# Altium PCB PCB2.PcbDoc
Units mm, origin at the board's own origin, x right, y up, seen from the top; angles counter-clockwise.
Board outline 76.91 x 76.67 mm, 2 copper layers (Top Layer, Bottom Layer); 20 components, 13 nets, 58 pads, 9 vias.
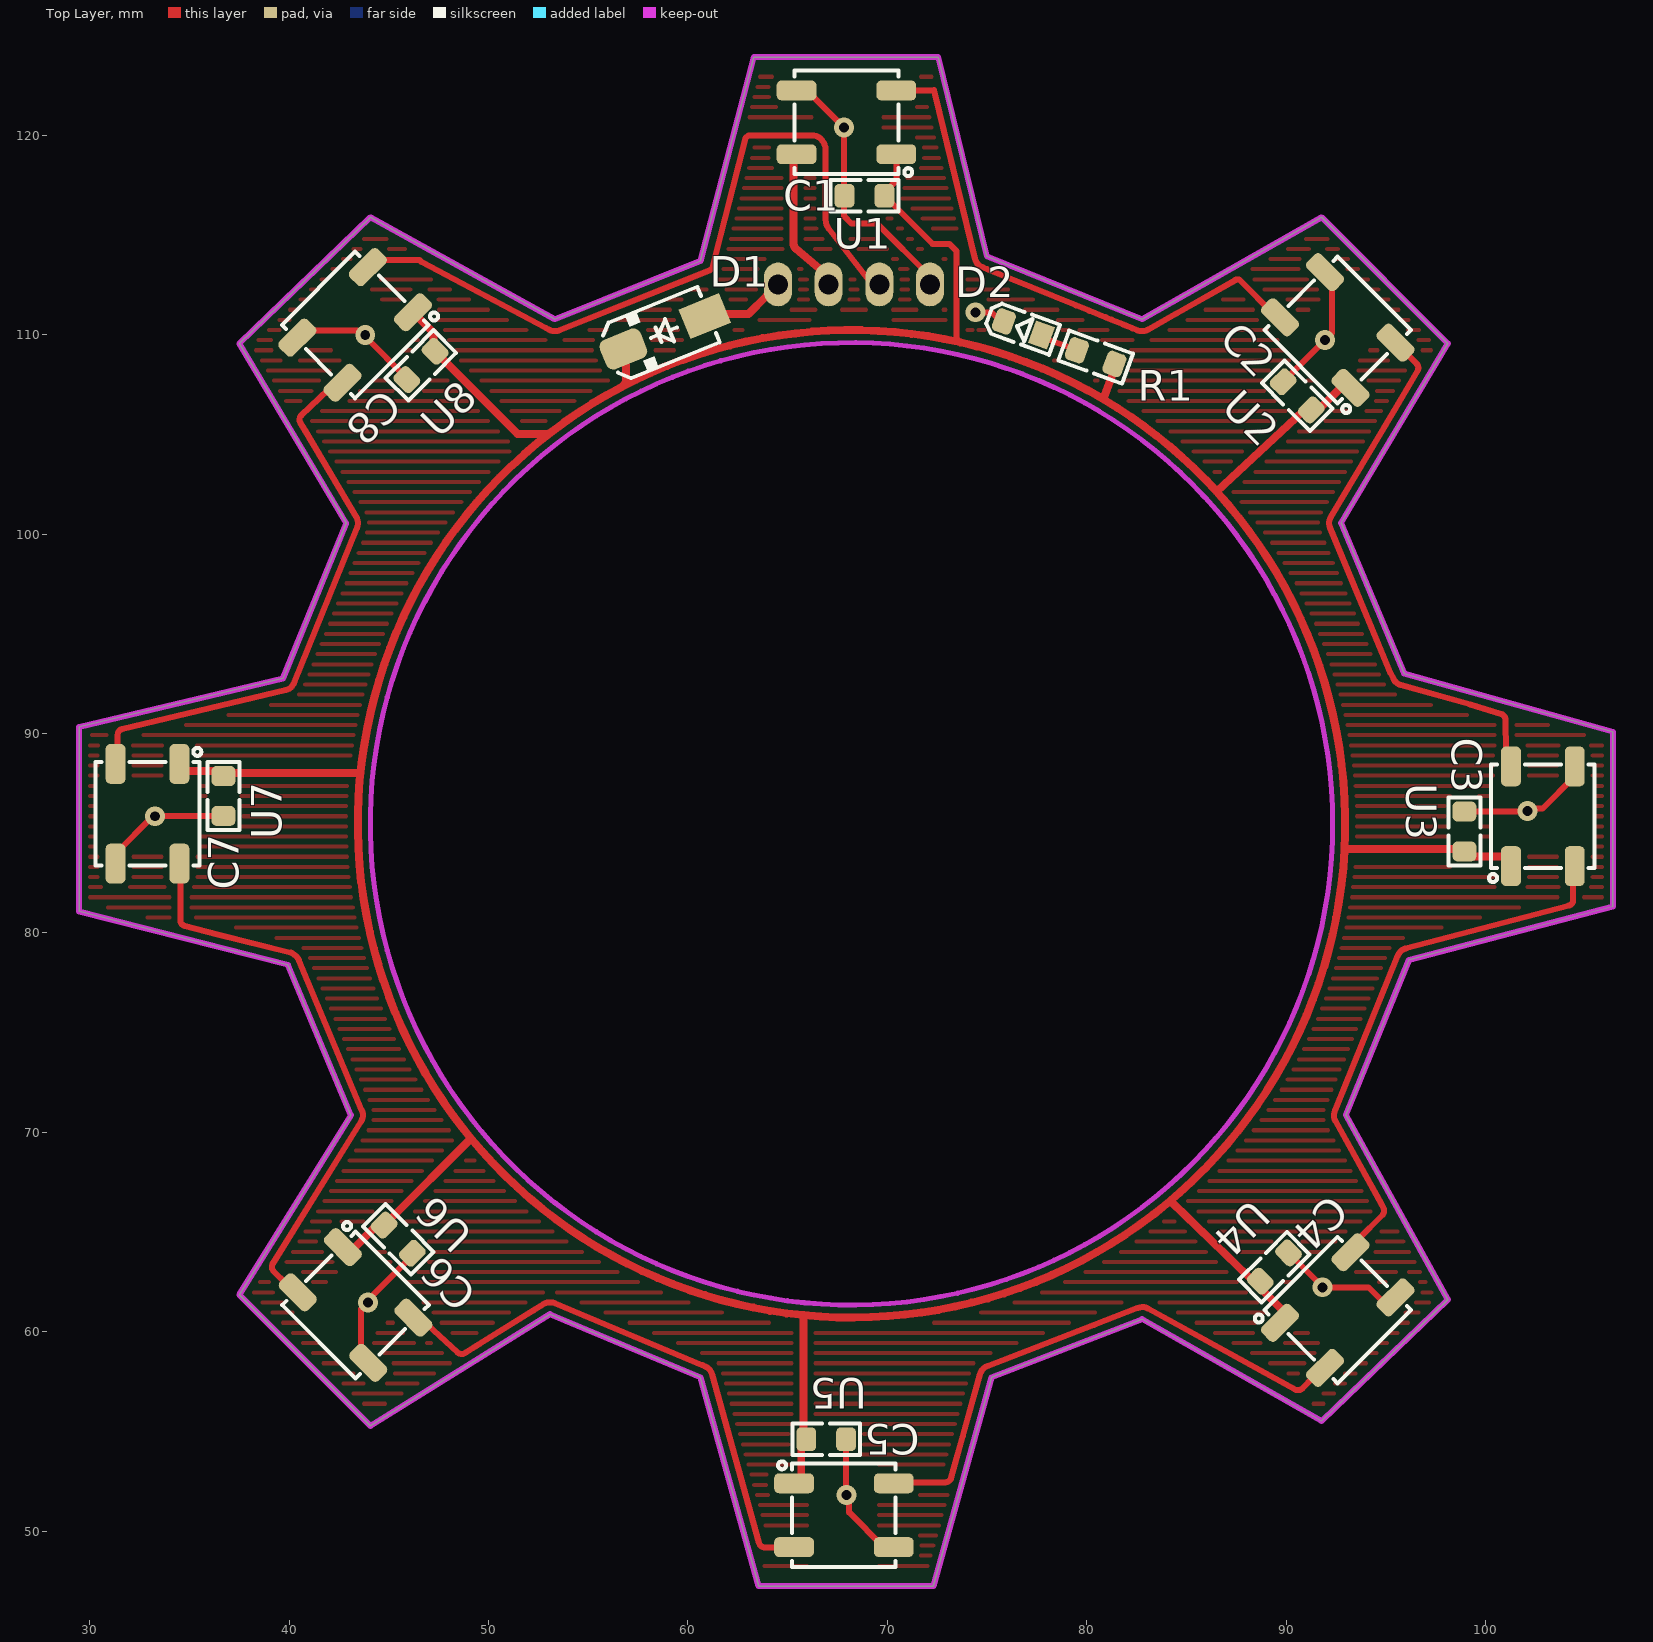
[diagram p0: Top Layer view]
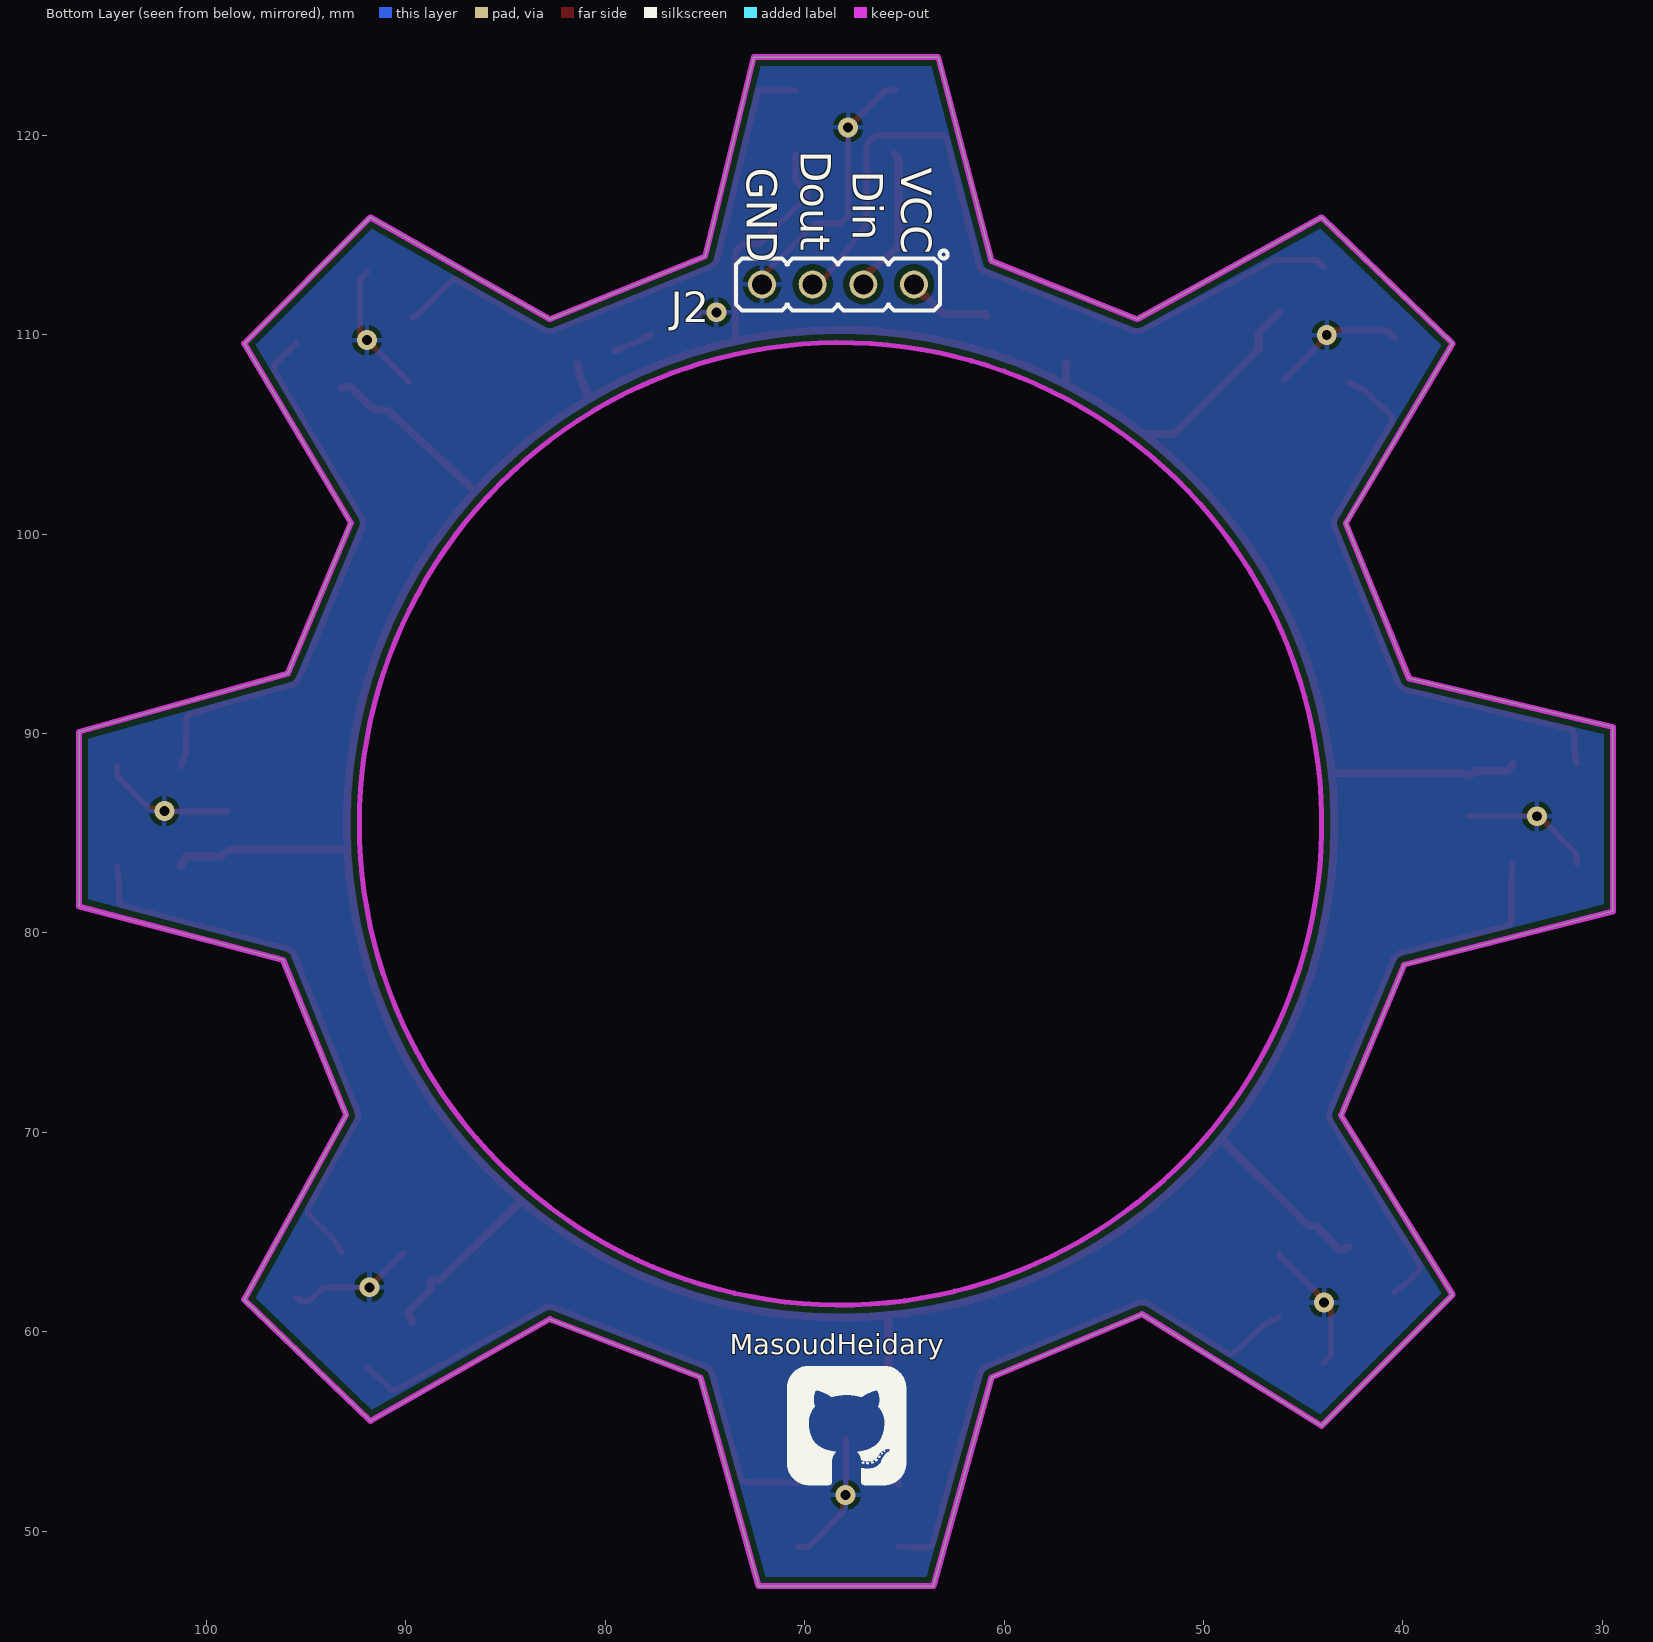
[diagram p1: Bottom Layer view, seen from below]

## Layer stack, top to bottom
Top Solder: solder mask 0.0102, Solder Resist, Dk 3.5
Top Layer: signal copper 0.0356
Dielectric 1: dielectric 0.32, FR-4, Dk 4.8
Bottom Layer: signal copper 0.0356
Bottom Solder: solder mask 0.0102, Solder Resist, Dk 3.5

## Board outline
37.499,61.853 43.097,70.859 39.933,78.404 29.466,81.081 29.466,90.331 39.689,92.765 42.853,100.553 37.499,109.559 44.07,115.888 53.32,110.776 60.622,113.697 63.299,123.92 72.548,123.92 74.982,113.94 82.771,110.776 91.777,115.888 98.105,109.559 92.75,100.553 95.915,93.008 106.381,90.087 106.381,81.325 96.158,78.647 92.994,70.859 98.105,61.609 91.777,55.524 82.771,60.636 75.226,57.715 72.305,47.249 63.542,47.249 60.622,57.715 53.076,60.879 44.07,55.281
cut-out: 68.199,61.34 cw(c68.199,85.471) 44.068,85.471 cw(c68.199,85.471) 68.199,109.602 cw(c68.199,85.471) 92.33,85.471 cw(c68.199,85.471)

## Design rules (kind name [scope] priority, off if disabled: settings)
Clearance [All] p1: gap=0.3 ignorepadtopadclearanceinfootprint=TRUE
PolygonConnect [All] p1: connectstyle=Relief reliefconductorwidth=0.254 reliefentries=4 polygonreliefangle="90 Angle" airgapwidth=0.254
RoutingVias [All] p1: holewidth=0.5 width=1 viastyle="Through Hole" minholewidth=0.5 minwidth=1 maxholewidth=0.5 maxwidth=1
SolderMaskExpansion [All] p1: expansion=0.102 istentingtop=FALSE
Width [All] p1: maxlimit=10 minlimit=0.2 preferedwidth=0.3
30 further rules are at their usual default settings.

## Components (designator, comment, footprint, x,y, rotation, side; value= is the part's Value field where it differs from the comment)
C1 "100nF" C0805 68.85,116.967 r180 top
C2 "100nF" C0805 90.551,106.934 r135 top
C3 "100nF" C0805 98.933,85.09 r90 top
C4 "100nF" C0805 89.408,63.246 r45 top
C5 "100nF" C0805 66.929,54.61 r0 top
C6 "100nF" C0805 45.466,64.643 r315 top
C7 "100nF" C0805 36.703,86.868 r270 top
C8 "100nF" C0805 46.609,108.458 r225 top
D1 "1N4007" D_SMA 58.801,110.109 r202 top
D2 "LED805GRN" LED0805GRN 76.784,110.324 r160 top
J2 "HDR1X4" HDR_M_1X4 68.326,112.522 r0 bottom value=HDRM4
R1 "270" R0805 80.442,108.878 r340 top
U1 "WS2812B-B" LED5050RGB_4 67.945,120.65 r180 top
U2 "WS2812B-B" LED5050RGB_4 92.583,110.236 r135 top
U3 "WS2812B-B" LED5050RGB_4 102.87,85.852 r90 top
U4 "WS2812B-B" LED5050RGB_4 92.583,61.087 r45 top
U5 "WS2812B-B" LED5050RGB_4 67.818,50.8 r0 top
U6 "WS2812B-B" LED5050RGB_4 43.329,61.342 r315 top
U7 "WS2812B-B" LED5050RGB_4 32.893,85.979 r270 top
U8 "WS2812B-B" LED5050RGB_4 43.307,110.49 r225 top

## Footprints (in the part's own frame and the unit in brackets; to place one, negate y for a bottom-side part, rotate by r counter-clockwise, add the part's x,y. Pads: shape width x height; smd on the part's side, far side on the other; paste and mask are expansions set on the pad)
C0805 [mm] "CHIP Capacitor, 2.0X1.3mm, 0805"
  rrect50% 1x1.2 smd paste-5 mask+0.075: 1(-1,0) 2(1,0)
  Top Layer pour cut-out: -0.5,0.8 0.5,0.8 0.5,-0.8 -0.5,-0.8
  silkscreen extent -1.7,-0.8 1.7,0.8, body extent -1,-0.62 1,0.63, height 1
D_SMA [mm] "SMA Molded Diode, 2-Leads, Body 4.3x2.7mm, SOD-128"
  rect 2.2x1.6 smd paste-0.1: 1(-2.2,0)
  rrect50% 2.2x1.6 smd paste-0.1: 2(2.2,0)
  silkscreen extent -2.4,-1.5 2.9,1.5, body extent -2.75,-1.4 2.75,1.4, height 2.6
HDR_M_1X4 [mm] "Connector; Header; 4 Position"
  round 1.4 / inner round 1.4 / far side oval 1.4x2.2 hole 1 mask+0.1: 1(-3.81,0) 2(-1.27,0) 3(1.27,0) 4(3.81,0)
  silkscreen extent -5.5,-1.7 5.11,1.3, body extent -5.08,-1.27 5.08,1.27, height 8.54
LED0805GRN [mm] "LED SMD 0805, GREEN"
  rect 1x1.2 smd paste-2 mask+0.075: 1(-1,0)
  rrect50% 1x1.2 smd paste-2 mask+0.075: 2(1,0)
  Top Layer pour cut-out: -0.5,0.8 0.5,0.8 0.5,-0.8 -0.5,-0.8
  silkscreen extent -1.7,-0.8 1.8,0.8, body extent -1,-0.63 1,0.63, height 0.7
LED5050RGB_4 [mm] "LED 5mmX5mm, PLLC6"
  rrect50% 2x1 smd mask+0.1: 1(-2.5,1.6) 2(-2.5,-1.6) 3(2.5,-1.6) 4(2.5,1.6)
  Top Layer pour cut-out: -1.75,2.54 1.65,2.54 1.65,-2.54 -1.75,-2.54
  silkscreen extent -3.3,-2.6 2.6,2.7, body extent -2.7,-2.5 2.7,2.5, height 1.55
R0805 [mm] "CHIP RESISTOR 1/8 WATT ,2.0X1.3mm, 0805, 2012"
  rrect50% 1x1.2 smd paste-5 mask+0.075: 1(-1,0) 2(1,0)
  Top Layer pour cut-out: -0.5,0.8 0.5,0.8 0.5,-0.8 -0.5,-0.8
  silkscreen extent -1.7,-0.8 1.7,0.8, body extent -1.15,-0.67 1.15,0.68, height 0.76

## Part data
C1 C2 C3 C4 C5 C6 C7 C8: library part CAP_SMD_MLCC_0805, "CAP, MLCC, -F, -V, MATERIAL, -%, 0201", ASSEMBLY=ASSEMBLY, MANF=-, MANF_P#=MANF_PART#, PARAM="-, -%", PARAM2=-V, PRICE="100= 1$"
D1: library part DIODE_SMD_1N4007, "DIODE, GENERAL PURPOSE, 1000V/1A", ASSEMBLY=ASSEMBLY, DESC=DESCRIPTION, MANF=Kingtronics, MANF_P#=M7, PARAM="1000V VRRM", PARAM2=1A, PRICE=PRICE
D2: library part LED_SMD_0805_GRN, "LED, SMD, 0805, GREEN", ASSEMBLY=ASSEMBLY, DESC=DESCRIPTION, MANF=-, MANF_P#=-, PARAM=20mA, PARAM2=2.2V, PRICE=36t@Javan
J2: library part HDR_M_1X4, "CONN, HEADER, Male, pitch: 2.54mm, 4POS"
R1: library part RES_SMD, "RESISTOR, SMD", ASSEMBLY=ASSEMBLY, DESC=DESCRIPTION, DIST#=MOUSER, MANF=-, MANF_P#=-, PARAM=-W, PARAM2=1%, PRICE="100= 0.5$"
U1 U2 U3 U4 U5 U6 U7 U8: library part WS2812B-B_5050_4L, "LED, SMD, RGB with WS2812 4Lead", ASSEMBLY=ASSEMBLY, DESC=DESCRIPTION, MANF=Worldsemi, MANF_P#=WS2812B-B, PARAM="18mA, 2KHz/s, 800Kbps", PARAM2="3.7~5.3v, -25~80oC", PRICE=-

## Via types
v1: diameter 1, hole 0.5, Top Layer to Bottom Layer, 9 vias

## Nets (pads, with @x,y where several pads share a name; then routed paths per layer and width w, separated by ;. In a path a pad name is that pad's centre, name@x,y a point inside that pad or via, vN(x,y) a via of type N, cw(c..) or ccw(c..) an arc to the next point about the centre after c; other vN are vias at no path point)
+5V0: C1.1 C2.1 C3.1 C4.1 C5.1 C6.1 C7.1 C8.1 D1.2 R1.2 U1.1 U2.1 U3.1 U4.1 U5.1 U6.1 U7.1 U8.1 | length 233.2
  Top Layer w0.3: U1.1 70.445,117.716 69.85,117.121 C1.1 69.85,116.921 70.192,116.579 70.238,116.579 72.263,114.554 73.103,114.554 73.472,114.185 73.472,109.811 73.664,109.619
  Top Layer w0.4: U7.1 34.743,88.118 36.353,88.118 C7.1 37.053,88.011 43.561,88.011 ; U6.1 43.171,64.116 44.335,65.279 C6.1 45.015,65.589 49.119,69.693 ; U8.1 47.226,110.106 47.226,109.255 C8.1 51.452,105.029 52.959,105.029 ; D1.2@56.859,108.588 cw(c56.488,108.438) 56.888,108.439 56.888,107.736 cw(c56.488,107.738) 56.676,107.384 ; U5.1 65.679,52.65 65.679,54.26 C5.1 65.786,54.96 65.786,60.831 ; 80.834,106.764 81.348,108.176 R1.2 ; 84.201,66.548 88.277,62.61 C4.1 88.772,62.115 89.883,61.003 U4.1 ; 86.507,102.138 90.834,106.156 C2.1 91.682,106.298 92.794,107.409 U2.1 ; 92.964,84.201 98.583,84.201 C3.1 99.283,83.84 101.02,83.84 U3.1 ; 49.119,69.693 ccw(c68.199,85.471) 65.786,60.831 ; 49.119,69.693 cw(c68.199,85.471) 48.254,70.802 cw(c68.199,85.471) 56.676,107.384 ; 56.676,107.384 cw(c68.199,85.471) 73.664,109.619 cw(c68.199,85.471) 80.829,106.765 cw(c68.199,85.471) 80.834,106.763 cw(c68.199,85.471) 86.502,102.143 86.507,102.138 cw(c68.199,85.471) 89.043,72.11 cw(c68.199,85.471) 65.786,60.831
Din: J2.2 U1.4 | length 7.4
  Top Layer w0.4: 65.425,114.302 cw(c65.685,114.607) 65.285,114.607 65.285,118.8 U1.4 ; 65.426,114.301 67.056,112.922 J2.2
Dout: J2.3 U8.2 | length 38.1
  Top Layer w0.3: U8.2 44.297,113.743 46.531,113.743 46.576,113.698 ccw(c46.788,113.911) 46.647,113.646 52.872,110.338 cw(c52.731,110.073) 52.877,110.336 53.029,110.251 ccw(c53.32,110.776) 53.542,110.219 61.058,113.222 61.115,113.245 61.217,113.346 62.886,119.854 62.944,119.912 63.032,120 66.195,120 cw(c66.195,119.3) 66.895,119.301 66.902,115.764 66.902,115.762 ccw(c67.622,115.762) 67.056,115.316 69.041,112.773 69.052,112.759 69.065,112.746 69.153,112.658 69.596,112.658 J2.3
GND: C1.2 C2.2 C3.2 C4.2 C5.2 C6.2 C7.2 C8.2 D2.2 J2.4 U1.3 U2.3 U3.3 U4.3 U5.3 U6.3 U7.3 U8.3 | length 61.9
  Top Layer w0.3: U7.3 31.293,83.979 33.166,85.852 v1(33.274,85.852) 33.282,85.86 36.695,85.86 C7.2 ; U8.3 40.761,110.207 43.4,110.207 43.626,109.982 v1(43.815,109.982) 43.815,109.91 45.902,107.823 C8.2 ; U6.3 43.612,58.797 43.612,61.138 v1(43.942,61.468) 43.942,61.586 46.173,63.817 C6.2 ; U1.3 65.964,122.25 v1(67.818,120.396) 67.834,120.38 67.834,115.935 68.199,115.57 69.488,115.57 72.136,112.922 J2.4 ; C5.2 67.929,51.832 v1(67.945,51.816) 68.079,51.682 68.079,50.939 69.818,49.2 U5.3 ; v1(74.422,111.125) 75.222,111.125 75.681,110.666 D2.2 ; C2.2 89.853,107.641 91.939,109.728 v1(91.948,109.728) 92.3,110.08 92.3,112.782 U2.3 ; C4.2 91.821,62.247 v1(91.821,62.23) 94.127,62.23 94.816,61.541 95.3,61.541 U4.3 ; C3.2 98.941,86.098 102.1,86.098 v1(102.108,86.106) 102.242,86.24 102.858,86.24 104.47,87.852 U3.3
NetD1_1: D1.1 J2.1 | length 4.4
  Top Layer w0.4: D1.1 60.953,111.046 63.04,111.046 63.925,111.931 64.054,111.931 64.516,112.393 J2.1
NetD2_1: D2.1 R1.1 | length 2.5
  Top Layer w0.3: D2.1 78.021,109.774 79.272,109.319 R1.1
  Top Layer w0.4: D2.1 D2.1@78.007,109.883 ; R1.1@79.261,109.288 R1.1
NetU1_2: U1.2 U2.4 | length 28.2
  Top Layer w0.3: U1.2 72.245,122.25 ccw(c72.245,122.55) 72.335,122.264 cw(c72.044,122.19) 72.335,122.261 72.383,122.063 74.399,113.801 ccw(c74.982,113.94) 74.757,113.384 75.002,113.284 cw(c74.89,113.006) 75.005,113.284 79.46,111.474 cw(c79.349,111.195) 79.462,111.473 80.138,111.198 80.925,110.879 cw(c80.812,110.601) 80.926,110.878 81.231,110.754 cw(c81.118,110.476) 81.234,110.753 81.82,110.515 cw(c81.709,110.236) 81.822,110.514 ; 81.824,110.513 82.303,110.319 82.545,110.22 ccw(c82.771,110.776) 83.068,110.255 84.49,111.062 ccw(c84.342,111.323) 84.492,111.063 87.44,112.736 ; 87.44,112.736 cw(c87.587,112.475) 87.58,112.775 87.629,112.776 ; 87.63,112.776 89.427,110.979 ccw(c89.684,111.235) U2.4
NetU2_2: U2.2 U3.4 | length 27.7
  Top Layer w0.3: U2.2 96.012,109.069 96.539,108.542 96.541,108.541 cw(c96.326,108.331) 96.584,108.178 95.373,106.138 92.235,100.86 ccw(c92.75,100.553) 92.196,100.324 95.214,93.05 ccw(c95.491,93.165) 95.226,93.025 95.385,92.727 ccw(c95.915,93.008) 95.751,92.431 95.754,92.43 ccw(c95.835,92.719) 95.755,92.43 99.209,91.466 cw(c99.034,90.84) 99.226,91.461 100.778,90.984 cw(c100.69,90.697) 100.937,90.866 ; 100.938,90.866 100.939,90.864 cw(c100.691,90.696) 100.99,90.704 101.02,89.102 U3.4
NetU3_2: U3.2 U4.4 | length 27.9
  Top Layer w0.3: U4.4 93.618,64.648 94.826,65.855 ccw(c94.613,66.067) 94.877,66.211 94.786,66.376 92.468,70.57 cw(c92.994,70.859) 92.438,71.084 92.453,71.121 95.602,78.873 cw(c96.158,78.647) 95.721,79.059 95.759,79.099 cw(c95.978,78.894) 95.848,79.164 95.898,79.188 cw(c96.158,78.647) 96.006,79.228 104.165,81.365 ccw(c104.09,81.655) 104.39,81.655 104.39,82.602 U3.2
NetU4_2: U4.2 U5.4 | length 27.9
  Top Layer w0.3: U5.4 71.068,52.451 72.906,52.451 ccw(c72.906,52.751) 73.195,52.67 ; 73.195,52.671 73.318,53.111 73.782,54.775 74.648,57.878 cw(c75.226,57.715) 75.009,58.275 80.363,60.347 82.554,61.195 cw(c82.771,60.636) 83.06,61.162 90.452,57.103 ccw(c90.596,57.366) 90.808,57.153 91.364,57.709 U4.2
NetU5_2: U5.2 U6.4 | length 27.8
  Top Layer w0.3: U6.4 46.935,60.352 48.446,58.966 ccw(c48.649,59.187) 48.807,58.932 48.869,58.97 49.017,59.063 49.349,59.269 49.532,59.383 52.253,61.074 52.759,61.389 cw(c53.076,60.879) 53.31,61.432 60.719,58.325 60.854,58.268 cw(c60.622,57.715) 61.2,57.876 63.564,49.404 ccw(c63.853,49.484) 63.853,49.184 64.568,49.184 U5.2
NetU6_2: U6.2 U7.4 | length 28.5
  Top Layer w0.3: U7.4 34.543,82.729 34.543,80.635 ccw(c34.843,80.635) 34.767,80.345 ; 34.768,80.344 36.411,79.924 40.08,79.007 cw(c40.008,78.716) 40.175,78.965 ; 39.217,63.041 39.824,62.434 U6.2 ; 39.216,63.042 cw(c39.429,63.253) 39.174,63.411 43.606,70.542 ccw(c43.097,70.859) 43.695,70.907 43.692,70.947 ; 40.176,78.964 40.27,78.9 cw(c39.933,78.404) 40.486,78.636 43.65,71.091 cw(c43.097,70.859) 43.662,71.061 43.675,71.024 cw(c43.393,70.922) 43.692,70.948
NetU7_2: U7.2 U8.4 | length 28.4
  Top Layer w0.3: U7.2 31.398,89.229 31.398,89.937 cw(c31.698,89.937) 31.629,90.229 39.83,92.181 ccw(c39.689,92.765) 40.245,92.539 40.263,92.582 43.396,100.294 43.409,100.328 ccw(c42.853,100.553) 43.368,100.862 40.802,105.177 40.558,105.588 ; 40.558,105.589 cw(c40.816,105.741) 40.61,105.959 41.963,107.237 U8.4

## Polygon pours and split planes (outlines as drawn)
GND on Bottom Layer "GND_L02_P001" (solid, remove dead copper, pour order 1): 37.499,61.853 43.097,70.859 39.933,78.404 29.466,81.081 29.466,90.331 39.689,92.765 42.853,100.553 37.499,109.559 44.07,115.888 53.32,110.776 60.622,113.697 63.299,123.92 72.548,123.92 74.982,113.94 82.771,110.776 91.777,115.888 98.105,109.559 92.75,100.553 95.915,93.008 106.381,90.087 106.381,81.325 96.158,78.647 92.994,70.859 98.105,61.609 91.777,55.524 82.771,60.636 75.226,57.715 72.305,47.249 63.542,47.249 60.622,57.715 53.076,60.879 44.07,55.281
no net on Top Layer "NONET_L01_P003" (hatched Horizontal grid 0.508 track 0.203, pour order 3): 37.499,61.853 43.097,70.859 39.933,78.404 29.466,81.081 29.466,90.331 39.689,92.765 42.853,100.553 37.499,109.559 44.07,115.888 53.32,110.776 60.622,113.697 63.299,123.92 72.548,123.92 74.982,113.94 82.771,110.776 91.777,115.888 98.105,109.559 92.75,100.553 95.915,93.008 106.381,90.087 106.381,81.325 96.158,78.647 92.994,70.859 98.105,61.609 91.777,55.524 82.771,60.636 75.226,57.715 72.305,47.249 63.542,47.249 60.622,57.715 53.076,60.879 44.07,55.281

## Keep-outs
Keep-Out Layer:
  circle w0.254: c68.199,85.471 r24.131
  lines w0.3: 29.466,81.081 39.933,78.404 43.097,70.859 37.499,61.853 44.07,55.281 53.076,60.879 60.622,57.715 63.542,47.249 72.305,47.249 75.226,57.715 82.771,60.636 91.777,55.524 98.105,61.609 92.994,70.859 96.158,78.647 106.381,81.325 106.381,90.087 95.915,93.008 92.75,100.553 98.105,109.559 91.777,115.888 82.771,110.776 74.982,113.94 72.548,123.92 63.299,123.92 60.622,113.697 53.32,110.776 44.07,115.888 37.499,109.559 42.853,100.553 39.689,92.765 29.466,90.331 29.466,81.081

## Silkscreen, mask and mechanical layers (free items; w line width, h text height)
Bottom Overlay:
  drawing of 8 lines, arcs and shapes, not listed
  text "Dout" at 70.191,119.235 h1.52 r90
  text "VCC" at 65.151,118.364 h1.52 r90
  text "GND" at 72.898,118.364 h1.52 r90
  text "Din" at 67.596,118.22 h1.52 r90
  text "MasoudHeidary" at 73.748,58.867 h1